# EAGLE board 14075-LuMini_1Inch-panel (EAGLE 9.0.1), part 1 of 3
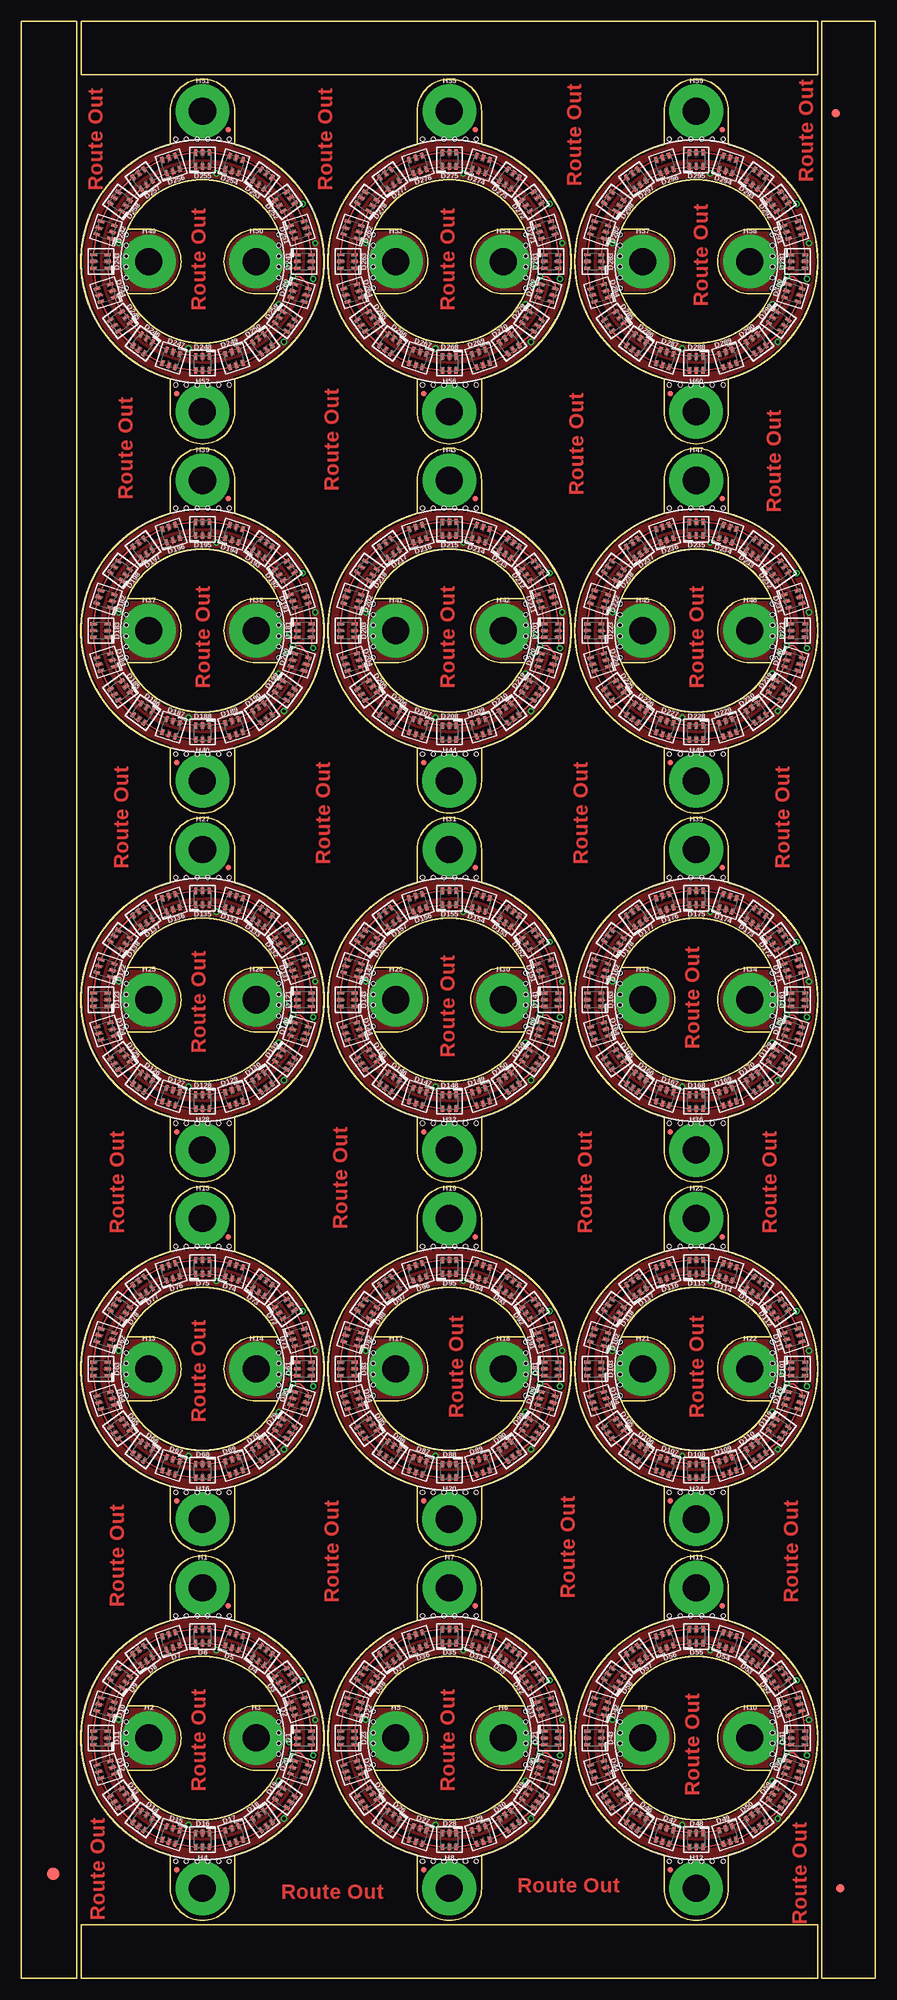
[diagram p0: board, top side]
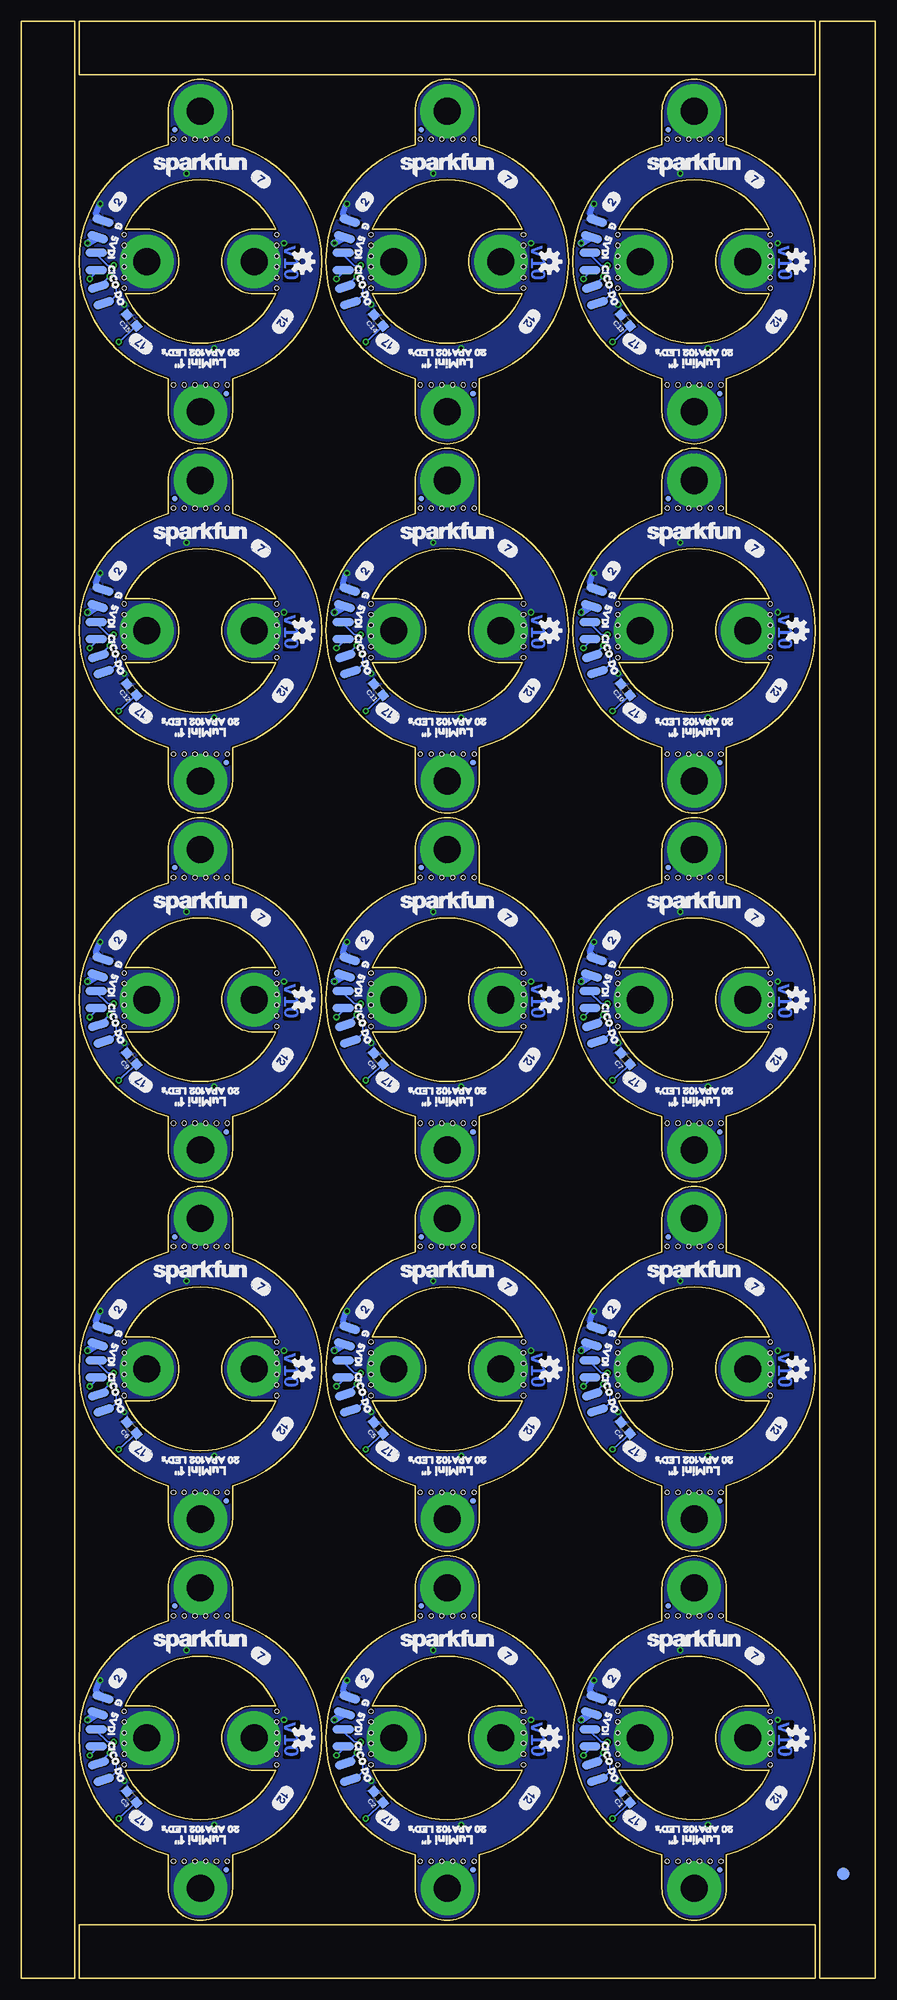
[diagram p1: board, bottom side, seen from below]

Size 101.09 x 231.65 mm. Coordinates in mm from the lower left corner, seen from the top.
Outline: 323 segments
Copper layers (1*16): Top 0.035mm / dielectric 1.5mm / Bottom 0.035mm
Design rules "SparkFun-2-layer-TIGHT": minimum track width 7mil, minimum drill 15mil, track to track 7mil, track to pad 7mil, pad to pad 7mil, via to via 7mil, smd to smd 7mil, copper to edge 7mil, drill to drill 7mil, minimum pad ring 7mil, minimum via ring 7mil, stop-mask expansion 4mil, vias tented up to drill 25mil, thermal gap 10mil
Holes 0.51 mm at 12.45,25.27 12.45,26.54 12.45,27.81 12.45,29.08 12.45,30.35 12.45,31.62 30.48,25.27 30.48,26.54 30.48,27.81 30.48,29.08 30.48,30.35 30.48,31.62 24.64,13.84 23.37,13.84 22.1,13.84 20.83,13.84 19.56,13.84 18.29,13.84 24.64,42.93 23.37,42.93 22.1,42.93 20.83,42.93 19.56,42.93 18.29,42.93 41.66,25.27 41.66,26.54 41.66,27.81 41.66,29.08 41.66,30.35 41.66,31.62 59.69,25.27 59.69,26.54 59.69,27.81 59.69,29.08 59.69,30.35 59.69,31.62 53.85,13.84 52.58,13.84 51.31,13.84 50.04,13.84 48.77,13.84 47.5,13.84 53.85,42.93 52.58,42.93 51.31,42.93 50.04,42.93 48.77,42.93 47.5,42.93 70.87,25.27 70.87,26.54 70.87,27.81 70.87,29.08 70.87,30.35 70.87,31.62 88.9,25.27 88.9,26.54 88.9,27.81 88.9,29.08 88.9,30.35 88.9,31.62 83.06,13.84 81.79,13.84 80.52,13.84 79.25,13.84 77.98,13.84 76.71,13.84 83.06,42.93 81.79,42.93 80.52,42.93 79.25,42.93 77.98,42.93 76.71,42.93 12.45,68.96 12.45,70.23 12.45,71.5 12.45,72.77 12.45,74.04 12.45,75.31 30.48,68.96 30.48,70.23 30.48,71.5 30.48,72.77 30.48,74.04 30.48,75.31 24.64,57.53 23.37,57.53 22.1,57.53 20.83,57.53 19.56,57.53 18.29,57.53 24.64,86.61 23.37,86.61 22.1,86.61 20.83,86.61 19.56,86.61 18.29,86.61 41.66,68.96 41.66,70.23 41.66,71.5 41.66,72.77 41.66,74.04 41.66,75.31 59.69,68.96 59.69,70.23 59.69,71.5 59.69,72.77 59.69,74.04 59.69,75.31 53.85,57.53 52.58,57.53 51.31,57.53 50.04,57.53 48.77,57.53 47.5,57.53 53.85,86.61 52.58,86.61 51.31,86.61 50.04,86.61 48.77,86.61 47.5,86.61 70.87,68.96 70.87,70.23 70.87,71.5 70.87,72.77 70.87,74.04 70.87,75.31 88.9,68.96 88.9,70.23 88.9,71.5 88.9,72.77 88.9,74.04 88.9,75.31 83.06,57.53 81.79,57.53 80.52,57.53 79.25,57.53 77.98,57.53 76.71,57.53 83.06,86.61 81.79,86.61 80.52,86.61 79.25,86.61 77.98,86.61 76.71,86.61 12.45,112.65 12.45,113.92 12.45,115.19 12.45,116.46 12.45,117.73 12.45,119 30.48,112.65 30.48,113.92 30.48,115.19 30.48,116.46 30.48,117.73 30.48,119 24.64,101.22 23.37,101.22 22.1,101.22 20.83,101.22 19.56,101.22 18.29,101.22 24.64,130.3 23.37,130.3 22.1,130.3 20.83,130.3 19.56,130.3 18.29,130.3 41.66,112.65 41.66,113.92 41.66,115.19 41.66,116.46 41.66,117.73 41.66,119 59.69,112.65 59.69,113.92 59.69,115.19 59.69,116.46 59.69,117.73 59.69,119 53.85,101.22 52.58,101.22 51.31,101.22 50.04,101.22 48.77,101.22 47.5,101.22 53.85,130.3 52.58,130.3 51.31,130.3 50.04,130.3 48.77,130.3 47.5,130.3 70.87,112.65 70.87,113.92 70.87,115.19 70.87,116.46 70.87,117.73 70.87,119 88.9,112.65 88.9,113.92 88.9,115.19 88.9,116.46 88.9,117.73 88.9,119 83.06,101.22 81.79,101.22 80.52,101.22 79.25,101.22 77.98,101.22 76.71,101.22 83.06,130.3 81.79,130.3 80.52,130.3 79.25,130.3 77.98,130.3 76.71,130.3 12.45,156.34 12.45,157.61 12.45,158.88 12.45,160.15 12.45,161.42 12.45,162.69 30.48,156.34 30.48,157.61 30.48,158.88 30.48,160.15 30.48,161.42 30.48,162.69 24.64,144.91 23.37,144.91 22.1,144.91 20.83,144.91 19.56,144.91 18.29,144.91 24.64,173.99 23.37,173.99 22.1,173.99 20.83,173.99 19.56,173.99 18.29,173.99 41.66,156.34 41.66,157.61 41.66,158.88 41.66,160.15 41.66,161.42 41.66,162.69 59.69,156.34 59.69,157.61 59.69,158.88 59.69,160.15 59.69,161.42 59.69,162.69 53.85,144.91 52.58,144.91 51.31,144.91 50.04,144.91 48.77,144.91 47.5,144.91 53.85,173.99 52.58,173.99 51.31,173.99 50.04,173.99 48.77,173.99 47.5,173.99 70.87,156.34 70.87,157.61 70.87,158.88 70.87,160.15 70.87,161.42 70.87,162.69 88.9,156.34 88.9,157.61 88.9,158.88 88.9,160.15 88.9,161.42 88.9,162.69 83.06,144.91 81.79,144.91 80.52,144.91 79.25,144.91 77.98,144.91 76.71,144.91 83.06,173.99 81.79,173.99 80.52,173.99 79.25,173.99 77.98,173.99 76.71,173.99 12.45,200.03 12.45,201.3 12.45,202.56 12.45,203.84 12.45,205.11 12.45,206.38 30.48,200.03 30.48,201.3 30.48,202.56 30.48,203.84 30.48,205.11 30.48,206.38 24.64,188.59 23.37,188.59 22.1,188.59 20.83,188.59 19.56,188.59 18.29,188.59 24.64,217.68 23.37,217.68 22.1,217.68 20.83,217.68 19.56,217.68 18.29,217.68 41.66,200.03 41.66,201.3 41.66,202.56 41.66,203.84 41.66,205.11 41.66,206.38 59.69,200.03 59.69,201.3 59.69,202.56 59.69,203.84 59.69,205.11 59.69,206.38 53.85,188.59 52.58,188.59 51.31,188.59 50.04,188.59 48.77,188.59 47.5,188.59 53.85,217.68 52.58,217.68 51.31,217.68 50.04,217.68 48.77,217.68 47.5,217.68 70.87,200.03 70.87,201.3 70.87,202.56 70.87,203.84 70.87,205.11 70.87,206.38 88.9,200.03 88.9,201.3 88.9,202.56 88.9,203.84 88.9,205.11 88.9,206.38 83.06,188.59 81.79,188.59 80.52,188.59 79.25,188.59 77.98,188.59 76.71,188.59 83.06,217.68 81.79,217.68 80.52,217.68 79.25,217.68 77.98,217.68 76.71,217.68

## Footprints (pad centres in the part's own frame; a part is rotated, then mirrored left to right if it is on the bottom)
0603 = smd 1.1 x 1: 1 -0.85,0; 2 0.85,0
APA102-2020 = smd 0.4 x 0.7: CKI -0.8,-0.85; CKO 0.8,-0.85; GND 0,0.85; SDI -0.8,0.85; SDO 0.8,0.85; VDD 0,-0.85
FIDUCIAL-1.5X3 = smd 1.5 x 1.5: 1 0,0
FIDUCIAL-1X2 = smd 1 x 1: 1 0,0
FIDUCIAL-MICRO = smd 0.635 x 0.635: 1 0,0
STANDOFF-ELECTRICAL-NOTHERMALS = drill 3.2 pad 6.35: P1 0,0
SOLDER_PAD_2 = smd 1.016 x 2.54: P$1 -1.016,0; P$2 1.016,0

## Placement (x,y rotation side)
C1  DNP  [0603]  29.59,21.46 130 bottom
C2  DNP  [0603]  58.8,21.46 130 bottom
C3  DNP  [0603]  88.01,21.46 130 bottom
C4  DNP  [0603]  29.59,65.15 130 bottom
C5  DNP  [0603]  58.8,65.15 130 bottom
C6  DNP  [0603]  88.01,65.15 130 bottom
C7  DNP  [0603]  29.59,108.84 130 bottom
C8  DNP  [0603]  58.8,108.84 130 bottom
C9  DNP  [0603]  88.01,108.84 130 bottom
C10  DNP  [0603]  29.59,152.53 130 bottom
C11  DNP  [0603]  58.8,152.53 130 bottom
C12  DNP  [0603]  88.01,152.53 130 bottom
C13  DNP  [0603]  29.59,196.22 130 bottom
C14  DNP  [0603]  58.8,196.22 130 bottom
C15  DNP  [0603]  88.01,196.22 130 bottom
D1  APA102-2020  [APA102-2020]  33.53,28.45 90 top
D2  APA102-2020  [APA102-2020]  32.94,32.18 108 top
D3  APA102-2020  [APA102-2020]  31.22,35.53 126 top
D4  APA102-2020  [APA102-2020]  28.55,38.2 144 top
D5  APA102-2020  [APA102-2020]  25.2,39.93 162 top
D6  APA102-2020  [APA102-2020]  21.46,40.51 180 top
D7  APA102-2020  [APA102-2020]  17.73,39.93 198 top
D8  APA102-2020  [APA102-2020]  14.38,38.2 216 top
D9  APA102-2020  [APA102-2020]  11.71,35.53 234 top
D10  APA102-2020  [APA102-2020]  9.98,32.18 252 top
D11  APA102-2020  [APA102-2020]  9.4,28.45 270 top
D12  APA102-2020  [APA102-2020]  9.98,24.71 288 top
D13  APA102-2020  [APA102-2020]  11.71,21.36 306 top
D14  APA102-2020  [APA102-2020]  14.38,18.69 324 top
D15  APA102-2020  [APA102-2020]  17.73,16.97 342 top
D16  APA102-2020  [APA102-2020]  21.46,16.38 0 top
D17  APA102-2020  [APA102-2020]  25.2,16.97 18 top
D18  APA102-2020  [APA102-2020]  28.55,18.69 36 top
D19  APA102-2020  [APA102-2020]  31.22,21.36 54 top
D20  APA102-2020  [APA102-2020]  32.94,24.71 72 top
D21  APA102-2020  [APA102-2020]  62.74,28.45 90 top
D22  APA102-2020  [APA102-2020]  39.19,32.18 252 top
D23  APA102-2020  [APA102-2020]  38.61,28.45 270 top
D24  APA102-2020  [APA102-2020]  39.19,24.71 288 top
D25  APA102-2020  [APA102-2020]  40.92,21.36 306 top
D26  APA102-2020  [APA102-2020]  43.59,18.69 324 top
D27  APA102-2020  [APA102-2020]  46.94,16.97 342 top
D28  APA102-2020  [APA102-2020]  50.67,16.38 0 top
D29  APA102-2020  [APA102-2020]  54.41,16.97 18 top
D30  APA102-2020  [APA102-2020]  57.76,18.69 36 top
D31  APA102-2020  [APA102-2020]  62.15,32.18 108 top
D32  APA102-2020  [APA102-2020]  60.43,35.53 126 top
D33  APA102-2020  [APA102-2020]  57.76,38.2 144 top
D34  APA102-2020  [APA102-2020]  54.41,39.93 162 top
D35  APA102-2020  [APA102-2020]  50.67,40.51 180 top
D36  APA102-2020  [APA102-2020]  46.94,39.93 198 top
D37  APA102-2020  [APA102-2020]  43.59,38.2 216 top
D38  APA102-2020  [APA102-2020]  40.92,35.53 234 top
D39  APA102-2020  [APA102-2020]  60.43,21.36 54 top
D40  APA102-2020  [APA102-2020]  62.15,24.71 72 top
D41  APA102-2020  [APA102-2020]  91.95,28.45 90 top
D42  APA102-2020  [APA102-2020]  68.4,32.18 252 top
D43  APA102-2020  [APA102-2020]  67.82,28.45 270 top
D44  APA102-2020  [APA102-2020]  68.4,24.71 288 top
D45  APA102-2020  [APA102-2020]  70.13,21.36 306 top
D46  APA102-2020  [APA102-2020]  72.8,18.69 324 top
D47  APA102-2020  [APA102-2020]  76.15,16.97 342 top
D48  APA102-2020  [APA102-2020]  79.88,16.38 0 top
D49  APA102-2020  [APA102-2020]  83.62,16.97 18 top
D50  APA102-2020  [APA102-2020]  86.97,18.69 36 top
D51  APA102-2020  [APA102-2020]  91.36,32.18 108 top
D52  APA102-2020  [APA102-2020]  89.64,35.53 126 top
D53  APA102-2020  [APA102-2020]  86.97,38.2 144 top
D54  APA102-2020  [APA102-2020]  83.62,39.93 162 top
D55  APA102-2020  [APA102-2020]  79.88,40.51 180 top
D56  APA102-2020  [APA102-2020]  76.15,39.93 198 top
D57  APA102-2020  [APA102-2020]  72.8,38.2 216 top
D58  APA102-2020  [APA102-2020]  70.13,35.53 234 top
D59  APA102-2020  [APA102-2020]  89.64,21.36 54 top
D60  APA102-2020  [APA102-2020]  91.36,24.71 72 top
D61  APA102-2020  [APA102-2020]  33.53,72.14 90 top
D62  APA102-2020  [APA102-2020]  9.98,75.87 252 top
D63  APA102-2020  [APA102-2020]  9.4,72.14 270 top
D64  APA102-2020  [APA102-2020]  9.98,68.4 288 top
D65  APA102-2020  [APA102-2020]  11.71,65.05 306 top
D66  APA102-2020  [APA102-2020]  14.38,62.38 324 top
D67  APA102-2020  [APA102-2020]  17.73,60.66 342 top
D68  APA102-2020  [APA102-2020]  21.46,60.07 0 top
D69  APA102-2020  [APA102-2020]  25.2,60.66 18 top
D70  APA102-2020  [APA102-2020]  28.55,62.38 36 top
D71  APA102-2020  [APA102-2020]  32.94,75.87 108 top
D72  APA102-2020  [APA102-2020]  31.22,79.22 126 top
D73  APA102-2020  [APA102-2020]  28.55,81.89 144 top
D74  APA102-2020  [APA102-2020]  25.2,83.62 162 top
D75  APA102-2020  [APA102-2020]  21.46,84.2 180 top
D76  APA102-2020  [APA102-2020]  17.73,83.62 198 top
D77  APA102-2020  [APA102-2020]  14.38,81.89 216 top
D78  APA102-2020  [APA102-2020]  11.71,79.22 234 top
D79  APA102-2020  [APA102-2020]  31.22,65.05 54 top
D80  APA102-2020  [APA102-2020]  32.94,68.4 72 top
D81  APA102-2020  [APA102-2020]  62.74,72.14 90 top
D82  APA102-2020  [APA102-2020]  39.19,75.87 252 top
D83  APA102-2020  [APA102-2020]  38.61,72.14 270 top
D84  APA102-2020  [APA102-2020]  39.19,68.4 288 top
D85  APA102-2020  [APA102-2020]  40.92,65.05 306 top
D86  APA102-2020  [APA102-2020]  43.59,62.38 324 top
D87  APA102-2020  [APA102-2020]  46.94,60.66 342 top
D88  APA102-2020  [APA102-2020]  50.67,60.07 0 top
D89  APA102-2020  [APA102-2020]  54.41,60.66 18 top
D90  APA102-2020  [APA102-2020]  57.76,62.38 36 top
D91  APA102-2020  [APA102-2020]  62.15,75.87 108 top
D92  APA102-2020  [APA102-2020]  60.43,79.22 126 top
D93  APA102-2020  [APA102-2020]  57.76,81.89 144 top
D94  APA102-2020  [APA102-2020]  54.41,83.62 162 top
D95  APA102-2020  [APA102-2020]  50.67,84.2 180 top
D96  APA102-2020  [APA102-2020]  46.94,83.62 198 top
D97  APA102-2020  [APA102-2020]  43.59,81.89 216 top
D98  APA102-2020  [APA102-2020]  40.92,79.22 234 top
D99  APA102-2020  [APA102-2020]  60.43,65.05 54 top
D100  APA102-2020  [APA102-2020]  62.15,68.4 72 top
D101  APA102-2020  [APA102-2020]  91.95,72.14 90 top
D102  APA102-2020  [APA102-2020]  68.4,75.87 252 top
D103  APA102-2020  [APA102-2020]  67.82,72.14 270 top
D104  APA102-2020  [APA102-2020]  68.4,68.4 288 top
D105  APA102-2020  [APA102-2020]  70.13,65.05 306 top
D106  APA102-2020  [APA102-2020]  72.8,62.38 324 top
D107  APA102-2020  [APA102-2020]  76.15,60.66 342 top
D108  APA102-2020  [APA102-2020]  79.88,60.07 0 top
D109  APA102-2020  [APA102-2020]  83.62,60.66 18 top
D110  APA102-2020  [APA102-2020]  86.97,62.38 36 top
D111  APA102-2020  [APA102-2020]  91.36,75.87 108 top
D112  APA102-2020  [APA102-2020]  89.64,79.22 126 top
D113  APA102-2020  [APA102-2020]  86.97,81.89 144 top
D114  APA102-2020  [APA102-2020]  83.62,83.62 162 top
D115  APA102-2020  [APA102-2020]  79.88,84.2 180 top
D116  APA102-2020  [APA102-2020]  76.15,83.62 198 top
D117  APA102-2020  [APA102-2020]  72.8,81.89 216 top
D118  APA102-2020  [APA102-2020]  70.13,79.22 234 top
D119  APA102-2020  [APA102-2020]  89.64,65.05 54 top
D120  APA102-2020  [APA102-2020]  91.36,68.4 72 top
D121  APA102-2020  [APA102-2020]  33.53,115.82 90 top
D122  APA102-2020  [APA102-2020]  9.98,119.56 252 top
D123  APA102-2020  [APA102-2020]  9.4,115.82 270 top
D124  APA102-2020  [APA102-2020]  9.98,112.09 288 top
D125  APA102-2020  [APA102-2020]  11.71,108.74 306 top
D126  APA102-2020  [APA102-2020]  14.38,106.07 324 top
D127  APA102-2020  [APA102-2020]  17.73,104.34 342 top
D128  APA102-2020  [APA102-2020]  21.46,103.76 0 top
D129  APA102-2020  [APA102-2020]  25.2,104.34 18 top
D130  APA102-2020  [APA102-2020]  28.55,106.07 36 top
D131  APA102-2020  [APA102-2020]  32.94,119.56 108 top
D132  APA102-2020  [APA102-2020]  31.22,122.91 126 top
D133  APA102-2020  [APA102-2020]  28.55,125.58 144 top
D134  APA102-2020  [APA102-2020]  25.2,127.3 162 top
D135  APA102-2020  [APA102-2020]  21.46,127.89 180 top
D136  APA102-2020  [APA102-2020]  17.73,127.3 198 top
D137  APA102-2020  [APA102-2020]  14.38,125.58 216 top
D138  APA102-2020  [APA102-2020]  11.71,122.91 234 top
D139  APA102-2020  [APA102-2020]  31.22,108.74 54 top
D140  APA102-2020  [APA102-2020]  32.94,112.09 72 top
D141  APA102-2020  [APA102-2020]  62.74,115.82 90 top
D142  APA102-2020  [APA102-2020]  39.19,119.56 252 top
D143  APA102-2020  [APA102-2020]  38.61,115.82 270 top
D144  APA102-2020  [APA102-2020]  39.19,112.09 288 top
D145  APA102-2020  [APA102-2020]  40.92,108.74 306 top
D146  APA102-2020  [APA102-2020]  43.59,106.07 324 top
D147  APA102-2020  [APA102-2020]  46.94,104.34 342 top
D148  APA102-2020  [APA102-2020]  50.67,103.76 0 top
D149  APA102-2020  [APA102-2020]  54.41,104.34 18 top
D150  APA102-2020  [APA102-2020]  57.76,106.07 36 top
D151  APA102-2020  [APA102-2020]  62.15,119.56 108 top
D152  APA102-2020  [APA102-2020]  60.43,122.91 126 top
D153  APA102-2020  [APA102-2020]  57.76,125.58 144 top
D154  APA102-2020  [APA102-2020]  54.41,127.3 162 top
D155  APA102-2020  [APA102-2020]  50.67,127.89 180 top
D156  APA102-2020  [APA102-2020]  46.94,127.3 198 top
D157  APA102-2020  [APA102-2020]  43.59,125.58 216 top
D158  APA102-2020  [APA102-2020]  40.92,122.91 234 top
D159  APA102-2020  [APA102-2020]  60.43,108.74 54 top
D160  APA102-2020  [APA102-2020]  62.15,112.09 72 top
D161  APA102-2020  [APA102-2020]  91.95,115.82 90 top
D162  APA102-2020  [APA102-2020]  68.4,119.56 252 top
D163  APA102-2020  [APA102-2020]  67.82,115.82 270 top
D164  APA102-2020  [APA102-2020]  68.4,112.09 288 top
D165  APA102-2020  [APA102-2020]  70.13,108.74 306 top
D166  APA102-2020  [APA102-2020]  72.8,106.07 324 top
D167  APA102-2020  [APA102-2020]  76.15,104.34 342 top
D168  APA102-2020  [APA102-2020]  79.88,103.76 0 top
D169  APA102-2020  [APA102-2020]  83.62,104.34 18 top
D170  APA102-2020  [APA102-2020]  86.97,106.07 36 top
D171  APA102-2020  [APA102-2020]  91.36,119.56 108 top
D172  APA102-2020  [APA102-2020]  89.64,122.91 126 top
D173  APA102-2020  [APA102-2020]  86.97,125.58 144 top
D174  APA102-2020  [APA102-2020]  83.62,127.3 162 top
D175  APA102-2020  [APA102-2020]  79.88,127.89 180 top
D176  APA102-2020  [APA102-2020]  76.15,127.3 198 top
D177  APA102-2020  [APA102-2020]  72.8,125.58 216 top
D178  APA102-2020  [APA102-2020]  70.13,122.91 234 top
D179  APA102-2020  [APA102-2020]  89.64,108.74 54 top
D180  APA102-2020  [APA102-2020]  91.36,112.09 72 top
D181  APA102-2020  [APA102-2020]  33.53,159.51 90 top
D182  APA102-2020  [APA102-2020]  9.98,163.25 252 top
D183  APA102-2020  [APA102-2020]  9.4,159.51 270 top
D184  APA102-2020  [APA102-2020]  9.98,155.78 288 top
D185  APA102-2020  [APA102-2020]  11.71,152.43 306 top
D186  APA102-2020  [APA102-2020]  14.38,149.76 324 top
D187  APA102-2020  [APA102-2020]  17.73,148.03 342 top
D188  APA102-2020  [APA102-2020]  21.46,147.45 0 top
D189  APA102-2020  [APA102-2020]  25.2,148.03 18 top
D190  APA102-2020  [APA102-2020]  28.55,149.76 36 top
D191  APA102-2020  [APA102-2020]  32.94,163.25 108 top
D192  APA102-2020  [APA102-2020]  31.22,166.6 126 top
D193  APA102-2020  [APA102-2020]  28.55,169.27 144 top
D194  APA102-2020  [APA102-2020]  25.2,170.99 162 top
D195  APA102-2020  [APA102-2020]  21.46,171.58 180 top
D196  APA102-2020  [APA102-2020]  17.73,170.99 198 top
D197  APA102-2020  [APA102-2020]  14.38,169.27 216 top
D198  APA102-2020  [APA102-2020]  11.71,166.6 234 top
D199  APA102-2020  [APA102-2020]  31.22,152.43 54 top
D200  APA102-2020  [APA102-2020]  32.94,155.78 72 top
D201  APA102-2020  [APA102-2020]  62.74,159.51 90 top
D202  APA102-2020  [APA102-2020]  39.19,163.25 252 top
D203  APA102-2020  [APA102-2020]  38.61,159.51 270 top
D204  APA102-2020  [APA102-2020]  39.19,155.78 288 top
D205  APA102-2020  [APA102-2020]  40.92,152.43 306 top
D206  APA102-2020  [APA102-2020]  43.59,149.76 324 top
D207  APA102-2020  [APA102-2020]  46.94,148.03 342 top
D208  APA102-2020  [APA102-2020]  50.67,147.45 0 top
D209  APA102-2020  [APA102-2020]  54.41,148.03 18 top
D210  APA102-2020  [APA102-2020]  57.76,149.76 36 top
D211  APA102-2020  [APA102-2020]  62.15,163.25 108 top
D212  APA102-2020  [APA102-2020]  60.43,166.6 126 top
D213  APA102-2020  [APA102-2020]  57.76,169.27 144 top
D214  APA102-2020  [APA102-2020]  54.41,170.99 162 top
D215  APA102-2020  [APA102-2020]  50.67,171.58 180 top
D216  APA102-2020  [APA102-2020]  46.94,170.99 198 top
D217  APA102-2020  [APA102-2020]  43.59,169.27 216 top
D218  APA102-2020  [APA102-2020]  40.92,166.6 234 top
D219  APA102-2020  [APA102-2020]  60.43,152.43 54 top
D220  APA102-2020  [APA102-2020]  62.15,155.78 72 top
D221  APA102-2020  [APA102-2020]  91.95,159.51 90 top
D222  APA102-2020  [APA102-2020]  68.4,163.25 252 top
D223  APA102-2020  [APA102-2020]  67.82,159.51 270 top
D224  APA102-2020  [APA102-2020]  68.4,155.78 288 top
D225  APA102-2020  [APA102-2020]  70.13,152.43 306 top
D226  APA102-2020  [APA102-2020]  72.8,149.76 324 top
D227  APA102-2020  [APA102-2020]  76.15,148.03 342 top
D228  APA102-2020  [APA102-2020]  79.88,147.45 0 top
D229  APA102-2020  [APA102-2020]  83.62,148.03 18 top
D230  APA102-2020  [APA102-2020]  86.97,149.76 36 top
D231  APA102-2020  [APA102-2020]  91.36,163.25 108 top
D232  APA102-2020  [APA102-2020]  89.64,166.6 126 top
D233  APA102-2020  [APA102-2020]  86.97,169.27 144 top
D234  APA102-2020  [APA102-2020]  83.62,170.99 162 top
D235  APA102-2020  [APA102-2020]  79.88,171.58 180 top
D236  APA102-2020  [APA102-2020]  76.15,170.99 198 top
D237  APA102-2020  [APA102-2020]  72.8,169.27 216 top
D238  APA102-2020  [APA102-2020]  70.13,166.6 234 top
D239  APA102-2020  [APA102-2020]  89.64,152.43 54 top
D240  APA102-2020  [APA102-2020]  91.36,155.78 72 top
D241  APA102-2020  [APA102-2020]  33.53,203.2 90 top
D242  APA102-2020  [APA102-2020]  9.98,206.93 252 top
D243  APA102-2020  [APA102-2020]  9.4,203.2 270 top
D244  APA102-2020  [APA102-2020]  9.98,199.47 288 top
D245  APA102-2020  [APA102-2020]  11.71,196.11 306 top
D246  APA102-2020  [APA102-2020]  14.38,193.45 324 top
D247  APA102-2020  [APA102-2020]  17.73,191.72 342 top
D248  APA102-2020  [APA102-2020]  21.46,191.13 0 top
D249  APA102-2020  [APA102-2020]  25.2,191.72 18 top
D250  APA102-2020  [APA102-2020]  28.55,193.45 36 top
D251  APA102-2020  [APA102-2020]  32.94,206.93 108 top
D252  APA102-2020  [APA102-2020]  31.22,210.29 126 top
D253  APA102-2020  [APA102-2020]  28.55,212.95 144 top
D254  APA102-2020  [APA102-2020]  25.2,214.68 162 top
D255  APA102-2020  [APA102-2020]  21.46,215.27 180 top
D256  APA102-2020  [APA102-2020]  17.73,214.68 198 top
D257  APA102-2020  [APA102-2020]  14.38,212.95 216 top
D258  APA102-2020  [APA102-2020]  11.71,210.29 234 top
D259  APA102-2020  [APA102-2020]  31.22,196.11 54 top
D260  APA102-2020  [APA102-2020]  32.94,199.47 72 top
D261  APA102-2020  [APA102-2020]  62.74,203.2 90 top
D262  APA102-2020  [APA102-2020]  39.19,206.93 252 top
D263  APA102-2020  [APA102-2020]  38.61,203.2 270 top
D264  APA102-2020  [APA102-2020]  39.19,199.47 288 top
D265  APA102-2020  [APA102-2020]  40.92,196.11 306 top
D266  APA102-2020  [APA102-2020]  43.59,193.45 324 top
D267  APA102-2020  [APA102-2020]  46.94,191.72 342 top
D268  APA102-2020  [APA102-2020]  50.67,191.13 0 top
D269  APA102-2020  [APA102-2020]  54.41,191.72 18 top
D270  APA102-2020  [APA102-2020]  57.76,193.45 36 top
D271  APA102-2020  [APA102-2020]  62.15,206.93 108 top
D272  APA102-2020  [APA102-2020]  60.43,210.29 126 top
D273  APA102-2020  [APA102-2020]  57.76,212.95 144 top
D274  APA102-2020  [APA102-2020]  54.41,214.68 162 top
D275  APA102-2020  [APA102-2020]  50.67,215.27 180 top
D276  APA102-2020  [APA102-2020]  46.94,214.68 198 top
D277  APA102-2020  [APA102-2020]  43.59,212.95 216 top
D278  APA102-2020  [APA102-2020]  40.92,210.29 234 top
D279  APA102-2020  [APA102-2020]  60.43,196.11 54 top
D280  APA102-2020  [APA102-2020]  62.15,199.47 72 top
D281  APA102-2020  [APA102-2020]  91.95,203.2 90 top
D282  APA102-2020  [APA102-2020]  68.4,206.93 252 top
D283  APA102-2020  [APA102-2020]  67.82,203.2 270 top
D284  APA102-2020  [APA102-2020]  68.4,199.47 288 top
D285  APA102-2020  [APA102-2020]  70.13,196.11 306 top
D286  APA102-2020  [APA102-2020]  72.8,193.45 324 top
D287  APA102-2020  [APA102-2020]  76.15,191.72 342 top
D288  APA102-2020  [APA102-2020]  79.88,191.13 0 top
D289  APA102-2020  [APA102-2020]  83.62,191.72 18 top
D290  APA102-2020  [APA102-2020]  86.97,193.45 36 top
D291  APA102-2020  [APA102-2020]  91.36,206.93 108 top
D292  APA102-2020  [APA102-2020]  89.64,210.29 126 top
D293  APA102-2020  [APA102-2020]  86.97,212.95 144 top
D294  APA102-2020  [APA102-2020]  83.62,214.68 162 top
D295  APA102-2020  [APA102-2020]  79.88,215.27 180 top
D296  APA102-2020  [APA102-2020]  76.15,214.68 198 top
D297  APA102-2020  [APA102-2020]  72.8,212.95 216 top
D298  APA102-2020  [APA102-2020]  70.13,210.29 234 top
D299  APA102-2020  [APA102-2020]  89.64,196.11 54 top
D300  APA102-2020  [APA102-2020]  91.36,199.47 72 top
E$5  [FIDUCIAL-1.5X3]  3.81,12.38 0 bottom
E$6  [FIDUCIAL-1.5X3]  3.81,12.38 0 top
E$7  [FIDUCIAL-1X2]  96.39,220.73 180 top
E$8  [FIDUCIAL-1X2]  96.9,10.67 0 top
FD1  FIDUCIALUFIDUCIAL  [FIDUCIAL-MICRO]  18.41,12.83 0 top
FD2  FIDUCIALUFIDUCIAL  [FIDUCIAL-MICRO]  18.41,12.83 0 bottom
FD3  FIDUCIALUFIDUCIAL  [FIDUCIAL-MICRO]  24.51,44.07 0 top
FD4  FIDUCIALUFIDUCIAL  [FIDUCIAL-MICRO]  24.51,44.07 0 bottom
FD5  FIDUCIALUFIDUCIAL  [FIDUCIAL-MICRO]  47.62,12.83 0 top
FD6  FIDUCIALUFIDUCIAL  [FIDUCIAL-MICRO]  47.62,12.83 0 bottom
FD7  FIDUCIALUFIDUCIAL  [FIDUCIAL-MICRO]  53.72,44.07 0 top
FD8  FIDUCIALUFIDUCIAL  [FIDUCIAL-MICRO]  53.72,44.07 0 bottom
FD9  FIDUCIALUFIDUCIAL  [FIDUCIAL-MICRO]  76.84,12.83 0 top
FD10  FIDUCIALUFIDUCIAL  [FIDUCIAL-MICRO]  76.84,12.83 0 bottom
FD11  FIDUCIALUFIDUCIAL  [FIDUCIAL-MICRO]  82.93,44.07 0 top
FD12  FIDUCIALUFIDUCIAL  [FIDUCIAL-MICRO]  82.93,44.07 0 bottom
FD13  FIDUCIALUFIDUCIAL  [FIDUCIAL-MICRO]  18.41,56.51 0 top
FD14  FIDUCIALUFIDUCIAL  [FIDUCIAL-MICRO]  18.41,56.51 0 bottom
FD15  FIDUCIALUFIDUCIAL  [FIDUCIAL-MICRO]  24.51,87.76 0 top
FD16  FIDUCIALUFIDUCIAL  [FIDUCIAL-MICRO]  24.51,87.76 0 bottom
FD17  FIDUCIALUFIDUCIAL  [FIDUCIAL-MICRO]  47.62,56.51 0 top
FD18  FIDUCIALUFIDUCIAL  [FIDUCIAL-MICRO]  47.62,56.51 0 bottom
FD19  FIDUCIALUFIDUCIAL  [FIDUCIAL-MICRO]  53.72,87.76 0 top
FD20  FIDUCIALUFIDUCIAL  [FIDUCIAL-MICRO]  53.72,87.76 0 bottom
FD21  FIDUCIALUFIDUCIAL  [FIDUCIAL-MICRO]  76.84,56.51 0 top
FD22  FIDUCIALUFIDUCIAL  [FIDUCIAL-MICRO]  76.84,56.51 0 bottom
FD23  FIDUCIALUFIDUCIAL  [FIDUCIAL-MICRO]  82.93,87.76 0 top
FD24  FIDUCIALUFIDUCIAL  [FIDUCIAL-MICRO]  82.93,87.76 0 bottom
FD25  FIDUCIALUFIDUCIAL  [FIDUCIAL-MICRO]  18.41,100.2 0 top
FD26  FIDUCIALUFIDUCIAL  [FIDUCIAL-MICRO]  18.41,100.2 0 bottom
FD27  FIDUCIALUFIDUCIAL  [FIDUCIAL-MICRO]  24.51,131.44 0 top
FD28  FIDUCIALUFIDUCIAL  [FIDUCIAL-MICRO]  24.51,131.44 0 bottom
FD29  FIDUCIALUFIDUCIAL  [FIDUCIAL-MICRO]  47.62,100.2 0 top
FD30  FIDUCIALUFIDUCIAL  [FIDUCIAL-MICRO]  47.62,100.2 0 bottom
FD31  FIDUCIALUFIDUCIAL  [FIDUCIAL-MICRO]  53.72,131.44 0 top
FD32  FIDUCIALUFIDUCIAL  [FIDUCIAL-MICRO]  53.72,131.44 0 bottom
FD33  FIDUCIALUFIDUCIAL  [FIDUCIAL-MICRO]  76.84,100.2 0 top
FD34  FIDUCIALUFIDUCIAL  [FIDUCIAL-MICRO]  76.84,100.2 0 bottom
FD35  FIDUCIALUFIDUCIAL  [FIDUCIAL-MICRO]  82.93,131.44 0 top
FD36  FIDUCIALUFIDUCIAL  [FIDUCIAL-MICRO]  82.93,131.44 0 bottom
FD37  FIDUCIALUFIDUCIAL  [FIDUCIAL-MICRO]  18.41,143.89 0 top
FD38  FIDUCIALUFIDUCIAL  [FIDUCIAL-MICRO]  18.41,143.89 0 bottom
FD39  FIDUCIALUFIDUCIAL  [FIDUCIAL-MICRO]  24.51,175.13 0 top
FD40  FIDUCIALUFIDUCIAL  [FIDUCIAL-MICRO]  24.51,175.13 0 bottom
FD41  FIDUCIALUFIDUCIAL  [FIDUCIAL-MICRO]  47.62,143.89 0 top
FD42  FIDUCIALUFIDUCIAL  [FIDUCIAL-MICRO]  47.62,143.89 0 bottom
FD43  FIDUCIALUFIDUCIAL  [FIDUCIAL-MICRO]  53.72,175.13 0 top
FD44  FIDUCIALUFIDUCIAL  [FIDUCIAL-MICRO]  53.72,175.13 0 bottom
FD45  FIDUCIALUFIDUCIAL  [FIDUCIAL-MICRO]  76.84,143.89 0 top
FD46  FIDUCIALUFIDUCIAL  [FIDUCIAL-MICRO]  76.84,143.89 0 bottom
FD47  FIDUCIALUFIDUCIAL  [FIDUCIAL-MICRO]  82.93,175.13 0 top
FD48  FIDUCIALUFIDUCIAL  [FIDUCIAL-MICRO]  82.93,175.13 0 bottom
FD49  FIDUCIALUFIDUCIAL  [FIDUCIAL-MICRO]  18.41,187.58 0 top
FD50  FIDUCIALUFIDUCIAL  [FIDUCIAL-MICRO]  18.41,187.58 0 bottom
FD51  FIDUCIALUFIDUCIAL  [FIDUCIAL-MICRO]  24.51,218.82 0 top
FD52  FIDUCIALUFIDUCIAL  [FIDUCIAL-MICRO]  24.51,218.82 0 bottom
FD53  FIDUCIALUFIDUCIAL  [FIDUCIAL-MICRO]  47.62,187.58 0 top
FD54  FIDUCIALUFIDUCIAL  [FIDUCIAL-MICRO]  47.62,187.58 0 bottom
FD55  FIDUCIALUFIDUCIAL  [FIDUCIAL-MICRO]  53.72,218.82 0 top
FD56  FIDUCIALUFIDUCIAL  [FIDUCIAL-MICRO]  53.72,218.82 0 bottom
FD57  FIDUCIALUFIDUCIAL  [FIDUCIAL-MICRO]  76.84,187.58 0 top
FD58  FIDUCIALUFIDUCIAL  [FIDUCIAL-MICRO]  76.84,187.58 0 bottom
FD59  FIDUCIALUFIDUCIAL  [FIDUCIAL-MICRO]  82.93,218.82 0 top
FD60  FIDUCIALUFIDUCIAL  [FIDUCIAL-MICRO]  82.93,218.82 0 bottom
H1  STANDOFF_ELECTRICAL-NOTHERMALS  [STANDOFF-ELECTRICAL-NOTHERMALS]  21.46,46.23 0 top
H2  STANDOFF_ELECTRICAL-NOTHERMALS  [STANDOFF-ELECTRICAL-NOTHERMALS]  15.11,28.45 0 top
H3  STANDOFF_ELECTRICAL-NOTHERMALS  [STANDOFF-ELECTRICAL-NOTHERMALS]  27.81,28.45 0 top
H4  STANDOFF_ELECTRICAL-NOTHERMALS  [STANDOFF-ELECTRICAL-NOTHERMALS]  21.45,10.67 0 top
H5  STANDOFF_ELECTRICAL-NOTHERMALS  [STANDOFF-ELECTRICAL-NOTHERMALS]  44.32,28.45 0 top
H6  STANDOFF_ELECTRICAL-NOTHERMALS  [STANDOFF-ELECTRICAL-NOTHERMALS]  57.02,28.45 0 top
H7  STANDOFF_ELECTRICAL-NOTHERMALS  [STANDOFF-ELECTRICAL-NOTHERMALS]  50.67,46.23 0 top
H8  STANDOFF_ELECTRICAL-NOTHERMALS  [STANDOFF-ELECTRICAL-NOTHERMALS]  50.66,10.67 0 top
H9  STANDOFF_ELECTRICAL-NOTHERMALS  [STANDOFF-ELECTRICAL-NOTHERMALS]  73.53,28.45 0 top
H10  STANDOFF_ELECTRICAL-NOTHERMALS  [STANDOFF-ELECTRICAL-NOTHERMALS]  86.23,28.45 0 top
H11  STANDOFF_ELECTRICAL-NOTHERMALS  [STANDOFF-ELECTRICAL-NOTHERMALS]  79.88,46.23 0 top
H12  STANDOFF_ELECTRICAL-NOTHERMALS  [STANDOFF-ELECTRICAL-NOTHERMALS]  79.87,10.67 0 top
H13  STANDOFF_ELECTRICAL-NOTHERMALS  [STANDOFF-ELECTRICAL-NOTHERMALS]  15.11,72.14 0 top
H14  STANDOFF_ELECTRICAL-NOTHERMALS  [STANDOFF-ELECTRICAL-NOTHERMALS]  27.81,72.14 0 top
H15  STANDOFF_ELECTRICAL-NOTHERMALS  [STANDOFF-ELECTRICAL-NOTHERMALS]  21.46,89.92 0 top
H16  STANDOFF_ELECTRICAL-NOTHERMALS  [STANDOFF-ELECTRICAL-NOTHERMALS]  21.45,54.36 0 top
H17  STANDOFF_ELECTRICAL-NOTHERMALS  [STANDOFF-ELECTRICAL-NOTHERMALS]  44.32,72.14 0 top
H18  STANDOFF_ELECTRICAL-NOTHERMALS  [STANDOFF-ELECTRICAL-NOTHERMALS]  57.02,72.14 0 top
H19  STANDOFF_ELECTRICAL-NOTHERMALS  [STANDOFF-ELECTRICAL-NOTHERMALS]  50.67,89.92 0 top
H20  STANDOFF_ELECTRICAL-NOTHERMALS  [STANDOFF-ELECTRICAL-NOTHERMALS]  50.66,54.36 0 top
H21  STANDOFF_ELECTRICAL-NOTHERMALS  [STANDOFF-ELECTRICAL-NOTHERMALS]  73.53,72.14 0 top
H22  STANDOFF_ELECTRICAL-NOTHERMALS  [STANDOFF-ELECTRICAL-NOTHERMALS]  86.23,72.14 0 top
H23  STANDOFF_ELECTRICAL-NOTHERMALS  [STANDOFF-ELECTRICAL-NOTHERMALS]  79.88,89.92 0 top
H24  STANDOFF_ELECTRICAL-NOTHERMALS  [STANDOFF-ELECTRICAL-NOTHERMALS]  79.87,54.36 0 top
H25  STANDOFF_ELECTRICAL-NOTHERMALS  [STANDOFF-ELECTRICAL-NOTHERMALS]  15.11,115.82 0 top
H26  STANDOFF_ELECTRICAL-NOTHERMALS  [STANDOFF-ELECTRICAL-NOTHERMALS]  27.81,115.82 0 top
H27  STANDOFF_ELECTRICAL-NOTHERMALS  [STANDOFF-ELECTRICAL-NOTHERMALS]  21.46,133.6 0 top
H28  STANDOFF_ELECTRICAL-NOTHERMALS  [STANDOFF-ELECTRICAL-NOTHERMALS]  21.45,98.04 0 top
H29  STANDOFF_ELECTRICAL-NOTHERMALS  [STANDOFF-ELECTRICAL-NOTHERMALS]  44.32,115.82 0 top
H30  STANDOFF_ELECTRICAL-NOTHERMALS  [STANDOFF-ELECTRICAL-NOTHERMALS]  57.02,115.82 0 top
H31  STANDOFF_ELECTRICAL-NOTHERMALS  [STANDOFF-ELECTRICAL-NOTHERMALS]  50.67,133.6 0 top
H32  STANDOFF_ELECTRICAL-NOTHERMALS  [STANDOFF-ELECTRICAL-NOTHERMALS]  50.66,98.04 0 top
H33  STANDOFF_ELECTRICAL-NOTHERMALS  [STANDOFF-ELECTRICAL-NOTHERMALS]  73.53,115.82 0 top
H34  STANDOFF_ELECTRICAL-NOTHERMALS  [STANDOFF-ELECTRICAL-NOTHERMALS]  86.23,115.82 0 top
H35  STANDOFF_ELECTRICAL-NOTHERMALS  [STANDOFF-ELECTRICAL-NOTHERMALS]  79.88,133.6 0 top
H36  STANDOFF_ELECTRICAL-NOTHERMALS  [STANDOFF-ELECTRICAL-NOTHERMALS]  79.87,98.04 0 top
H37  STANDOFF_ELECTRICAL-NOTHERMALS  [STANDOFF-ELECTRICAL-NOTHERMALS]  15.11,159.51 0 top
H38  STANDOFF_ELECTRICAL-NOTHERMALS  [STANDOFF-ELECTRICAL-NOTHERMALS]  27.81,159.51 0 top
H39  STANDOFF_ELECTRICAL-NOTHERMALS  [STANDOFF-ELECTRICAL-NOTHERMALS]  21.46,177.29 0 top
H40  STANDOFF_ELECTRICAL-NOTHERMALS  [STANDOFF-ELECTRICAL-NOTHERMALS]  21.45,141.73 0 top
H41  STANDOFF_ELECTRICAL-NOTHERMALS  [STANDOFF-ELECTRICAL-NOTHERMALS]  44.32,159.51 0 top
H42  STANDOFF_ELECTRICAL-NOTHERMALS  [STANDOFF-ELECTRICAL-NOTHERMALS]  57.02,159.51 0 top
H43  STANDOFF_ELECTRICAL-NOTHERMALS  [STANDOFF-ELECTRICAL-NOTHERMALS]  50.67,177.29 0 top
H44  STANDOFF_ELECTRICAL-NOTHERMALS  [STANDOFF-ELECTRICAL-NOTHERMALS]  50.66,141.73 0 top
H45  STANDOFF_ELECTRICAL-NOTHERMALS  [STANDOFF-ELECTRICAL-NOTHERMALS]  73.53,159.51 0 top
H46  STANDOFF_ELECTRICAL-NOTHERMALS  [STANDOFF-ELECTRICAL-NOTHERMALS]  86.23,159.51 0 top
H47  STANDOFF_ELECTRICAL-NOTHERMALS  [STANDOFF-ELECTRICAL-NOTHERMALS]  79.88,177.29 0 top
H48  STANDOFF_ELECTRICAL-NOTHERMALS  [STANDOFF-ELECTRICAL-NOTHERMALS]  79.87,141.73 0 top
H49  STANDOFF_ELECTRICAL-NOTHERMALS  [STANDOFF-ELECTRICAL-NOTHERMALS]  15.11,203.2 0 top
H50  STANDOFF_ELECTRICAL-NOTHERMALS  [STANDOFF-ELECTRICAL-NOTHERMALS]  27.81,203.2 0 top
H51  STANDOFF_ELECTRICAL-NOTHERMALS  [STANDOFF-ELECTRICAL-NOTHERMALS]  21.46,220.98 0 top
H52  STANDOFF_ELECTRICAL-NOTHERMALS  [STANDOFF-ELECTRICAL-NOTHERMALS]  21.45,185.42 0 top
H53  STANDOFF_ELECTRICAL-NOTHERMALS  [STANDOFF-ELECTRICAL-NOTHERMALS]  44.32,203.2 0 top
H54  STANDOFF_ELECTRICAL-NOTHERMALS  [STANDOFF-ELECTRICAL-NOTHERMALS]  57.02,203.2 0 top
H55  STANDOFF_ELECTRICAL-NOTHERMALS  [STANDOFF-ELECTRICAL-NOTHERMALS]  50.67,220.98 0 top
H56  STANDOFF_ELECTRICAL-NOTHERMALS  [STANDOFF-ELECTRICAL-NOTHERMALS]  50.66,185.42 0 top
H57  STANDOFF_ELECTRICAL-NOTHERMALS  [STANDOFF-ELECTRICAL-NOTHERMALS]  73.53,203.2 0 top
H58  STANDOFF_ELECTRICAL-NOTHERMALS  [STANDOFF-ELECTRICAL-NOTHERMALS]  86.23,203.2 0 top
H59  STANDOFF_ELECTRICAL-NOTHERMALS  [STANDOFF-ELECTRICAL-NOTHERMALS]  79.88,220.98 0 top
H60  STANDOFF_ELECTRICAL-NOTHERMALS  [STANDOFF-ELECTRICAL-NOTHERMALS]  79.87,185.42 0 top
J1  SOLDER_PAD_2  [SOLDER_PAD_2]  33.3,32.31 252 bottom
J2  SOLDER_PAD_2  [SOLDER_PAD_2]  33.78,28.46 270 bottom
J3  SOLDER_PAD_2  [SOLDER_PAD_2]  62.51,32.31 252 bottom
J4  SOLDER_PAD_2  [SOLDER_PAD_2]  33.21,24.49 108 bottom
J5  SOLDER_PAD_2  [SOLDER_PAD_2]  62.99,28.46 270 bottom
J6  SOLDER_PAD_2  [SOLDER_PAD_2]  62.42,24.49 108 bottom
J7  SOLDER_PAD_2  [SOLDER_PAD_2]  91.72,32.31 252 bottom
J8  SOLDER_PAD_2  [SOLDER_PAD_2]  92.2,28.46 270 bottom
J9  SOLDER_PAD_2  [SOLDER_PAD_2]  91.63,24.49 108 bottom
J10  SOLDER_PAD_2  [SOLDER_PAD_2]  33.3,76 252 bottom
J11  SOLDER_PAD_2  [SOLDER_PAD_2]  33.78,72.15 270 bottom
J12  SOLDER_PAD_2  [SOLDER_PAD_2]  33.21,68.17 108 bottom
J13  SOLDER_PAD_2  [SOLDER_PAD_2]  62.51,76 252 bottom
J14  SOLDER_PAD_2  [SOLDER_PAD_2]  62.99,72.15 270 bottom
J15  SOLDER_PAD_2  [SOLDER_PAD_2]  62.42,68.17 108 bottom
J16  SOLDER_PAD_2  [SOLDER_PAD_2]  91.72,76 252 bottom
J17  SOLDER_PAD_2  [SOLDER_PAD_2]  92.2,72.15 270 bottom
J18  SOLDER_PAD_2  [SOLDER_PAD_2]  91.63,68.17 108 bottom
J19  SOLDER_PAD_2  [SOLDER_PAD_2]  33.3,119.68 252 bottom
J20  SOLDER_PAD_2  [SOLDER_PAD_2]  33.78,115.84 270 bottom
J21  SOLDER_PAD_2  [SOLDER_PAD_2]  33.21,111.86 108 bottom
J22  SOLDER_PAD_2  [SOLDER_PAD_2]  62.51,119.68 252 bottom
J23  SOLDER_PAD_2  [SOLDER_PAD_2]  62.99,115.84 270 bottom
J24  SOLDER_PAD_2  [SOLDER_PAD_2]  62.42,111.86 108 bottom
J25  SOLDER_PAD_2  [SOLDER_PAD_2]  91.72,119.68 252 bottom
J26  SOLDER_PAD_2  [SOLDER_PAD_2]  92.2,115.84 270 bottom
J27  SOLDER_PAD_2  [SOLDER_PAD_2]  91.63,111.86 108 bottom
J28  SOLDER_PAD_2  [SOLDER_PAD_2]  33.3,163.37 252 bottom
J29  SOLDER_PAD_2  [SOLDER_PAD_2]  33.78,159.52 270 bottom
J30  SOLDER_PAD_2  [SOLDER_PAD_2]  33.21,155.55 108 bottom
J31  SOLDER_PAD_2  [SOLDER_PAD_2]  62.51,163.37 252 bottom
J32  SOLDER_PAD_2  [SOLDER_PAD_2]  62.99,159.52 270 bottom
J33  SOLDER_PAD_2  [SOLDER_PAD_2]  62.42,155.55 108 bottom
J34  SOLDER_PAD_2  [SOLDER_PAD_2]  91.72,163.37 252 bottom
J35  SOLDER_PAD_2  [SOLDER_PAD_2]  92.2,159.52 270 bottom
J36  SOLDER_PAD_2  [SOLDER_PAD_2]  91.63,155.55 108 bottom
J37  SOLDER_PAD_2  [SOLDER_PAD_2]  33.3,207.06 252 bottom
J38  SOLDER_PAD_2  [SOLDER_PAD_2]  33.78,203.21 270 bottom
J39  SOLDER_PAD_2  [SOLDER_PAD_2]  33.21,199.24 108 bottom
J40  SOLDER_PAD_2  [SOLDER_PAD_2]  62.51,207.06 252 bottom
J41  SOLDER_PAD_2  [SOLDER_PAD_2]  62.99,203.21 270 bottom
J42  SOLDER_PAD_2  [SOLDER_PAD_2]  62.42,199.24 108 bottom
J43  SOLDER_PAD_2  [SOLDER_PAD_2]  91.72,207.06 252 bottom
J44  SOLDER_PAD_2  [SOLDER_PAD_2]  92.2,203.21 270 bottom
J45  SOLDER_PAD_2  [SOLDER_PAD_2]  91.63,199.24 108 bottom
LOGO1  SFE_LOGO_NAME.1_INCH  [SFE_LOGO_NAME_.1]  21.46,39.88 0 bottom
LOGO2  OSHW-LOGOS  [OSHW-LOGO-S]  9.4,28.45 270 bottom
LOGO3  SFE_LOGO_NAME.1_INCH  [SFE_LOGO_NAME_.1]  50.67,39.88 0 bottom
LOGO4  OSHW-LOGOS  [OSHW-LOGO-S]  38.61,28.45 270 bottom
LOGO5  SFE_LOGO_NAME.1_INCH  [SFE_LOGO_NAME_.1]  79.88,39.88 0 bottom
LOGO6  OSHW-LOGOS  [OSHW-LOGO-S]  67.82,28.45 270 bottom
LOGO7  SFE_LOGO_NAME.1_INCH  [SFE_LOGO_NAME_.1]  21.46,83.57 0 bottom
LOGO8  OSHW-LOGOS  [OSHW-LOGO-S]  9.4,72.14 270 bottom
LOGO9  SFE_LOGO_NAME.1_INCH  [SFE_LOGO_NAME_.1]  50.67,83.57 0 bottom
LOGO10  OSHW-LOGOS  [OSHW-LOGO-S]  38.61,72.14 270 bottom
LOGO11  SFE_LOGO_NAME.1_INCH  [SFE_LOGO_NAME_.1]  79.88,83.57 0 bottom
LOGO12  OSHW-LOGOS  [OSHW-LOGO-S]  67.82,72.14 270 bottom
LOGO13  SFE_LOGO_NAME.1_INCH  [SFE_LOGO_NAME_.1]  21.46,127.25 0 bottom
LOGO14  OSHW-LOGOS  [OSHW-LOGO-S]  9.4,115.82 270 bottom
LOGO15  SFE_LOGO_NAME.1_INCH  [SFE_LOGO_NAME_.1]  50.67,127.25 0 bottom
LOGO16  OSHW-LOGOS  [OSHW-LOGO-S]  38.61,115.82 270 bottom
LOGO17  SFE_LOGO_NAME.1_INCH  [SFE_LOGO_NAME_.1]  79.88,127.25 0 bottom
LOGO18  OSHW-LOGOS  [OSHW-LOGO-S]  67.82,115.82 270 bottom
LOGO19  SFE_LOGO_NAME.1_INCH  [SFE_LOGO_NAME_.1]  21.46,170.94 0 bottom
LOGO20  OSHW-LOGOS  [OSHW-LOGO-S]  9.4,159.51 270 bottom
LOGO21  SFE_LOGO_NAME.1_INCH  [SFE_LOGO_NAME_.1]  50.67,170.94 0 bottom
LOGO22  OSHW-LOGOS  [OSHW-LOGO-S]  38.61,159.51 270 bottom
LOGO23  SFE_LOGO_NAME.1_INCH  [SFE_LOGO_NAME_.1]  79.88,170.94 0 bottom
LOGO24  OSHW-LOGOS  [OSHW-LOGO-S]  67.82,159.51 270 bottom
LOGO25  SFE_LOGO_NAME.1_INCH  [SFE_LOGO_NAME_.1]  21.46,214.63 0 bottom
LOGO26  OSHW-LOGOS  [OSHW-LOGO-S]  9.4,203.2 270 bottom
LOGO27  SFE_LOGO_NAME.1_INCH  [SFE_LOGO_NAME_.1]  50.67,214.63 0 bottom
LOGO28  OSHW-LOGOS  [OSHW-LOGO-S]  38.61,203.2 270 bottom
LOGO29  SFE_LOGO_NAME.1_INCH  [SFE_LOGO_NAME_.1]  79.88,214.63 0 bottom
LOGO30  OSHW-LOGOS  [OSHW-LOGO-S]  67.82,203.2 270 bottom
U$1  [20_APA102_LED#S6]  45.34,17.65 180 bottom
U$2  [20_APA102_LED#S6]  16.13,17.65 180 bottom
U$3  [20]  32.03,34.43 54 bottom
U$4  [5V6]  31.27,32.12 252 bottom
U$5  [G4]  30.77,33.71 252 bottom
U$6  [71]  15.35,38.94 324 bottom
U$7  [DO3]  31.51,25.59 288 bottom
U$8  [CO1]  32.11,27.55 288 bottom
U$9  [CI6]  31.95,28.74 270 bottom
U$10  [DI4]  31.97,30.59 270 bottom
U$11  [122]  10.76,22.66 234 bottom
U$12  [173]  27.24,17.77 144 bottom
U$13  [5V6]  60.48,32.12 252 bottom
U$14  [LUMINI_1#1]  17.53,16.38 180 bottom
U$15  [G4]  59.98,33.71 252 bottom
U$16  [DO3]  60.72,25.59 288 bottom
U$17  [CO1]  61.32,27.55 288 bottom
U$18  [CI6]  61.16,28.74 270 bottom
U$19  [DI4]  61.18,30.59 270 bottom
U$20  [20]  61.24,34.43 54 bottom
U$21  [71]  44.56,38.94 324 bottom
U$22  [122]  39.97,22.66 234 bottom
U$23  [173]  56.45,17.77 144 bottom
U$24  [LUMINI_1#1]  46.74,16.38 180 bottom
U$25  [20_APA102_LED#S6]  74.55,17.65 180 bottom
U$26  [5V6]  89.69,32.12 252 bottom
U$27  [G4]  89.19,33.71 252 bottom
U$28  [DO3]  89.93,25.59 288 bottom
U$29  [CO1]  90.53,27.55 288 bottom
U$30  [CI6]  90.37,28.74 270 bottom
U$31  [DI4]  90.39,30.59 270 bottom
U$32  [20]  90.45,34.43 54 bottom
U$33  [71]  73.77,38.94 324 bottom
U$34  [122]  69.18,22.66 234 bottom
U$35  [173]  85.66,17.77 144 bottom
U$36  [LUMINI_1#1]  75.95,16.38 180 bottom
U$37  [20_APA102_LED#S6]  16.13,61.34 180 bottom
U$38  [5V6]  31.27,75.81 252 bottom
U$39  [G4]  30.77,77.39 252 bottom
U$40  [DO3]  31.51,69.28 288 bottom
U$41  [CO1]  32.11,71.23 288 bottom
U$42  [CI6]  31.95,72.43 270 bottom
U$43  [DI4]  31.97,74.28 270 bottom
U$44  [20]  32.03,78.12 54 bottom
U$45  [71]  15.35,82.63 324 bottom
U$46  [122]  10.76,66.34 234 bottom
U$47  [173]  27.24,61.46 144 bottom
U$48  [LUMINI_1#1]  17.53,60.07 180 bottom
U$49  [20_APA102_LED#S6]  45.34,61.34 180 bottom
U$50  [5V6]  60.48,75.81 252 bottom
U$51  [G4]  59.98,77.39 252 bottom
U$52  [DO3]  60.72,69.28 288 bottom
U$53  [CO1]  61.32,71.23 288 bottom
U$54  [CI6]  61.16,72.43 270 bottom
U$55  [DI4]  61.18,74.28 270 bottom
U$56  [20]  61.24,78.12 54 bottom
U$57  [71]  44.56,82.63 324 bottom
U$58  [122]  39.97,66.34 234 bottom
U$59  [173]  56.45,61.46 144 bottom
U$60  [LUMINI_1#1]  46.74,60.07 180 bottom
U$61  [20_APA102_LED#S6]  74.55,61.34 180 bottom
U$62  [5V6]  89.69,75.81 252 bottom
U$63  [G4]  89.19,77.39 252 bottom
U$64  [DO3]  89.93,69.28 288 bottom
U$65  [CO1]  90.53,71.23 288 bottom
U$66  [CI6]  90.37,72.43 270 bottom
U$67  [DI4]  90.39,74.28 270 bottom
U$68  [20]  90.45,78.12 54 bottom
U$69  [71]  73.77,82.63 324 bottom
U$70  [122]  69.18,66.34 234 bottom
U$71  [173]  85.66,61.46 144 bottom
U$72  [LUMINI_1#1]  75.95,60.07 180 bottom
U$73  [20_APA102_LED#S6]  16.13,105.03 180 bottom
U$74  [5V6]  31.27,119.49 252 bottom
U$75  [G4]  30.77,121.08 252 bottom
U$76  [DO3]  31.51,112.97 288 bottom
U$77  [CO1]  32.11,114.92 288 bottom
U$78  [CI6]  31.95,116.12 270 bottom
U$79  [DI4]  31.97,117.97 270 bottom
U$80  [20]  32.03,121.81 54 bottom
U$81  [71]  15.35,126.31 324 bottom
U$82  [122]  10.76,110.03 234 bottom
U$83  [173]  27.24,105.14 144 bottom
U$84  [LUMINI_1#1]  17.53,103.76 180 bottom
U$85  [20_APA102_LED#S6]  45.34,105.03 180 bottom
U$86  [5V6]  60.48,119.49 252 bottom
U$87  [G4]  59.98,121.08 252 bottom
U$88  [DO3]  60.72,112.97 288 bottom
U$89  [CO1]  61.32,114.92 288 bottom
U$90  [CI6]  61.16,116.12 270 bottom
U$91  [DI4]  61.18,117.97 270 bottom
U$92  [20]  61.24,121.81 54 bottom
U$93  [71]  44.56,126.31 324 bottom
U$94  [122]  39.97,110.03 234 bottom
U$95  [173]  56.45,105.14 144 bottom
U$96  [LUMINI_1#1]  46.74,103.76 180 bottom
U$97  [20_APA102_LED#S6]  74.55,105.03 180 bottom
U$98  [5V6]  89.69,119.49 252 bottom
U$99  [G4]  89.19,121.08 252 bottom
U$100  [DO3]  89.93,112.97 288 bottom
U$101  [CO1]  90.53,114.92 288 bottom
U$102  [CI6]  90.37,116.12 270 bottom
U$103  [DI4]  90.39,117.97 270 bottom
U$104  [20]  90.45,121.81 54 bottom
U$105  [71]  73.77,126.31 324 bottom
U$106  [122]  69.18,110.03 234 bottom
U$107  [173]  85.66,105.14 144 bottom
U$108  [LUMINI_1#1]  75.95,103.76 180 bottom
U$109  [20_APA102_LED#S6]  16.13,148.72 180 bottom
U$110  [5V6]  31.27,163.18 252 bottom
U$111  [G4]  30.77,164.77 252 bottom
U$112  [DO3]  31.51,156.65 288 bottom
U$113  [CO1]  32.11,158.61 288 bottom
U$114  [CI6]  31.95,159.8 270 bottom
U$115  [DI4]  31.97,161.66 270 bottom
U$116  [20]  32.03,165.49 54 bottom
U$117  [71]  15.35,170 324 bottom
U$118  [122]  10.76,153.72 234 bottom
U$119  [173]  27.24,148.83 144 bottom
U$120  [LUMINI_1#1]  17.53,147.45 180 bottom
U$121  [20_APA102_LED#S6]  45.34,148.72 180 bottom
U$122  [5V6]  60.48,163.18 252 bottom
U$123  [G4]  59.98,164.77 252 bottom
U$124  [DO3]  60.72,156.65 288 bottom
U$125  [CO1]  61.32,158.61 288 bottom
U$126  [CI6]  61.16,159.8 270 bottom
U$127  [DI4]  61.18,161.66 270 bottom
U$128  [20]  61.24,165.49 54 bottom
U$129  [71]  44.56,170 324 bottom
U$130  [122]  39.97,153.72 234 bottom
U$131  [173]  56.45,148.83 144 bottom
U$132  [LUMINI_1#1]  46.74,147.45 180 bottom
U$133  [20_APA102_LED#S6]  74.55,148.72 180 bottom
U$134  [5V6]  89.69,163.18 252 bottom
U$135  [G4]  89.19,164.77 252 bottom
U$136  [DO3]  89.93,156.65 288 bottom
U$137  [CO1]  90.53,158.61 288 bottom
U$138  [CI6]  90.37,159.8 270 bottom
U$139  [DI4]  90.39,161.66 270 bottom
U$140  [20]  90.45,165.49 54 bottom
U$141  [71]  73.77,170 324 bottom
U$142  [122]  69.18,153.72 234 bottom
U$143  [173]  85.66,148.83 144 bottom
U$144  [LUMINI_1#1]  75.95,147.45 180 bottom
U$145  [20_APA102_LED#S6]  16.13,192.41 180 bottom
U$146  [5V6]  31.27,206.87 252 bottom
U$147  [G4]  30.77,208.46 252 bottom
U$148  [DO3]  31.51,200.34 288 bottom
U$149  [CO1]  32.11,202.3 288 bottom
U$150  [CI6]  31.95,203.49 270 bottom
U$151  [DI4]  31.97,205.35 270 bottom
U$152  [20]  32.03,209.18 54 bottom
U$153  [71]  15.35,213.69 324 bottom
U$154  [122]  10.76,197.41 234 bottom
U$155  [173]  27.24,192.52 144 bottom
U$156  [LUMINI_1#1]  17.53,191.13 180 bottom
U$157  [20_APA102_LED#S6]  45.34,192.41 180 bottom
U$158  [5V6]  60.48,206.87 252 bottom
U$159  [G4]  59.98,208.46 252 bottom
U$160  [DO3]  60.72,200.34 288 bottom
U$161  [CO1]  61.32,202.3 288 bottom
U$162  [CI6]  61.16,203.49 270 bottom
U$163  [DI4]  61.18,205.35 270 bottom
U$164  [20]  61.24,209.18 54 bottom
U$165  [71]  44.56,213.69 324 bottom
U$166  [122]  39.97,197.41 234 bottom
U$167  [173]  56.45,192.52 144 bottom
U$168  [LUMINI_1#1]  46.74,191.13 180 bottom
U$169  [20_APA102_LED#S6]  74.55,192.41 180 bottom
U$170  [5V6]  89.69,206.87 252 bottom
U$171  [G4]  89.19,208.46 252 bottom
U$172  [DO3]  89.93,200.34 288 bottom
U$173  [CO1]  90.53,202.3 288 bottom
U$174  [CI6]  90.37,203.49 270 bottom
U$175  [DI4]  90.39,205.35 270 bottom
U$176  [20]  90.45,209.18 54 bottom
U$177  [71]  73.77,213.69 324 bottom
U$178  [122]  69.18,197.41 234 bottom
U$179  [173]  85.66,192.52 144 bottom
U$180  [LUMINI_1#1]  75.95,191.13 180 bottom

## Library data of the parts
C1-C15 = SparkFun-Capacitors; PROD_ID: CAP-08280
D1-D300 = SparkFun-LED; PROD_ID: DIO-13883
E$5 E$6 = SparkFun-Retired
E$7 E$8 FD1-FD60 LOGO1-LOGO30 = SparkFun-Aesthetics
H1-H60 = SparkFun-Hardware
J1-J45 = SparkFun-Connectors
U$1 U$2 U$25 U$37 U$49 U$61 U$73 U$85 U$97 U$109 U$121 U$133 U$145 U$157 U$169 = buzzard_labels (22)
U$3 U$6 U$11 U$12 U$20-U$23 U$32-U$35 U$44-U$47 U$56-U$59 U$68-U$71 U$80-U$83 U$92-U$95 U$104-U$107 U$116-U$119 U$128-U$131 U$140-U$143 U$152-U$155 U$164-U$167 U$176-U$179 = buzzard_labels (7)
U$4 U$5 U$7 U$8 U$13 U$15-U$17 U$26-U$29 U$38-U$41 U$50-U$53 U$62-U$65 U$74-U$77 U$86-U$89 U$98-U$101 U$110-U$113 U$122-U$125 U$134-U$137 U$146-U$149 U$158-U$161 U$170-U$173 = buzzard_labels (25)
U$9 U$10 U$18 U$19 U$30 U$31 U$42 U$43 U$54 U$55 U$66 U$67 U$78 U$79 U$90 U$91 U$102 U$103 U$114 U$115 U$126 U$127 U$138 U$139 U$150 U$151 U$162 U$163 U$174 U$175 = buzzard_labels (26)
U$14 U$24 U$36 U$48 U$60 U$72 U$84 U$96 U$108 U$120 U$132 U$144 U$156 U$168 U$180 = buzzard_labels (8)